# Altium PCB nrf52833_qiaa_var4.PcbDoc
Units mm, origin at the board's own origin, x right, y up, seen from the top; angles counter-clockwise.
Board outline 21.5 x 19.5 mm, 4 copper layers (Top Layer, Mid Layer 1, Mid Layer 2, Bottom Layer), stack 1.583 mm thick; 27 components, 62 nets, 145 pads, 106 vias.
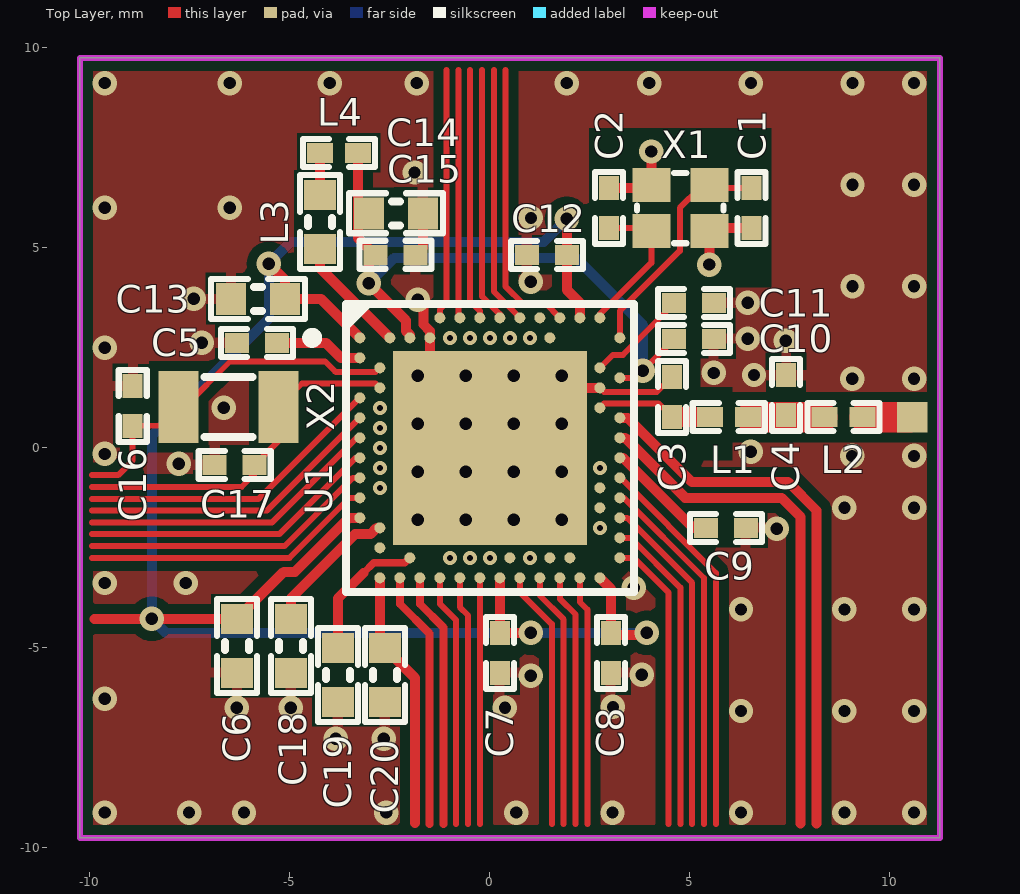
[diagram p0: Top Layer view]
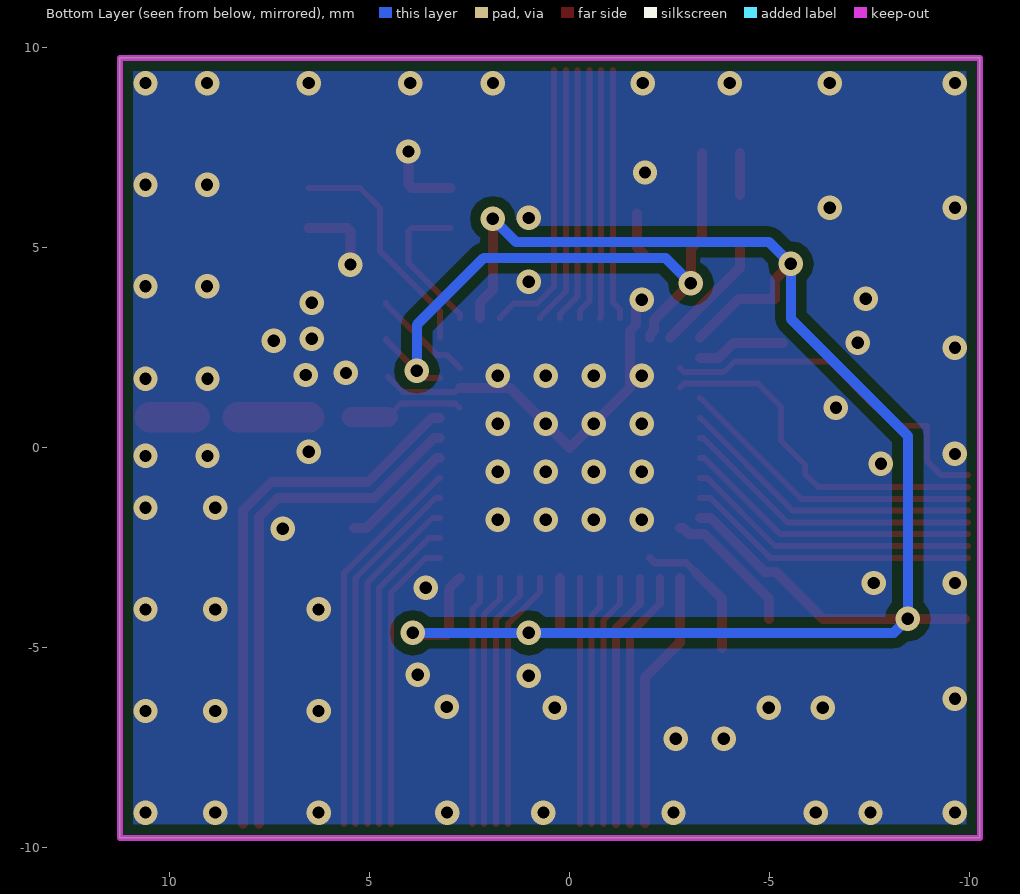
[diagram p1: Bottom Layer view, seen from below]
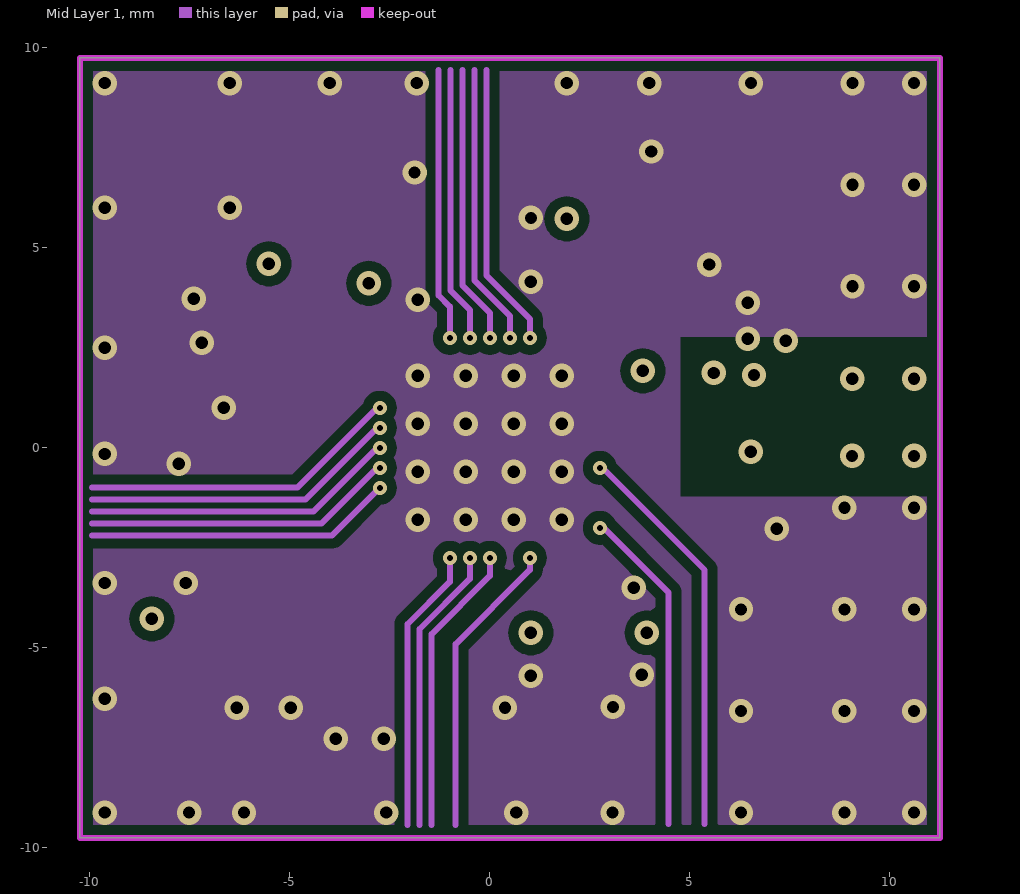
[diagram p2: Mid Layer 1]
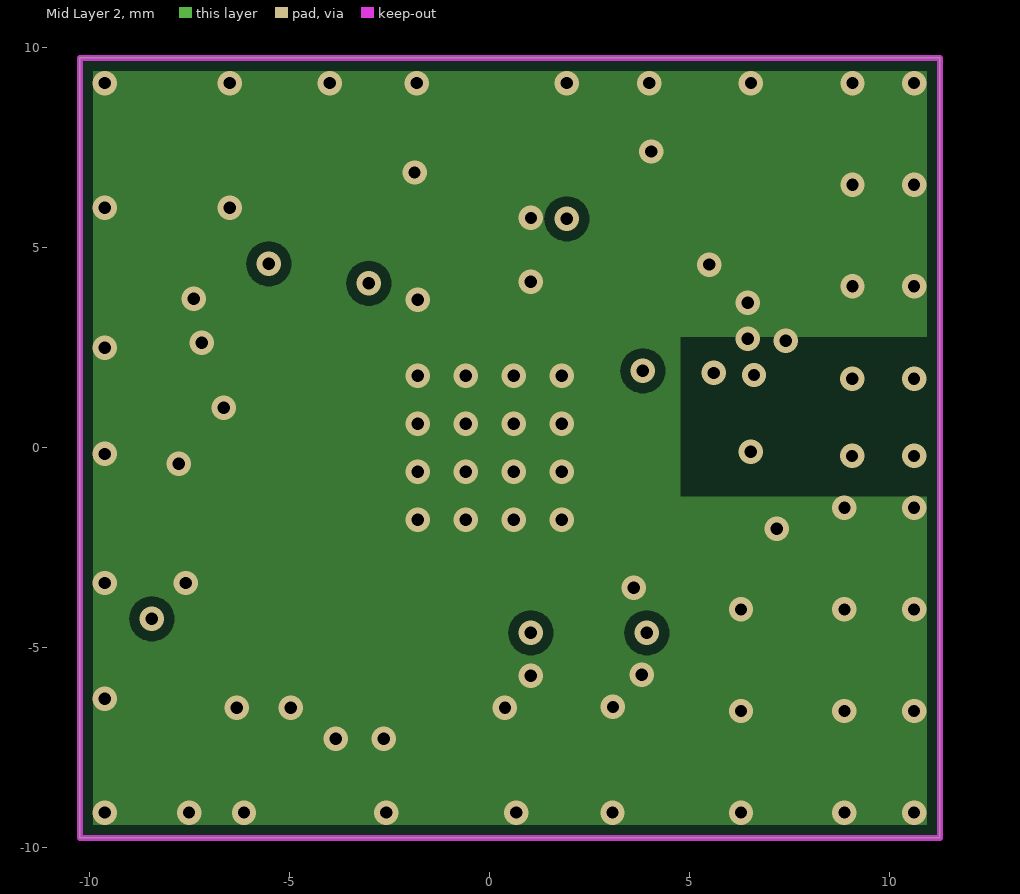
[diagram p3: Mid Layer 2]
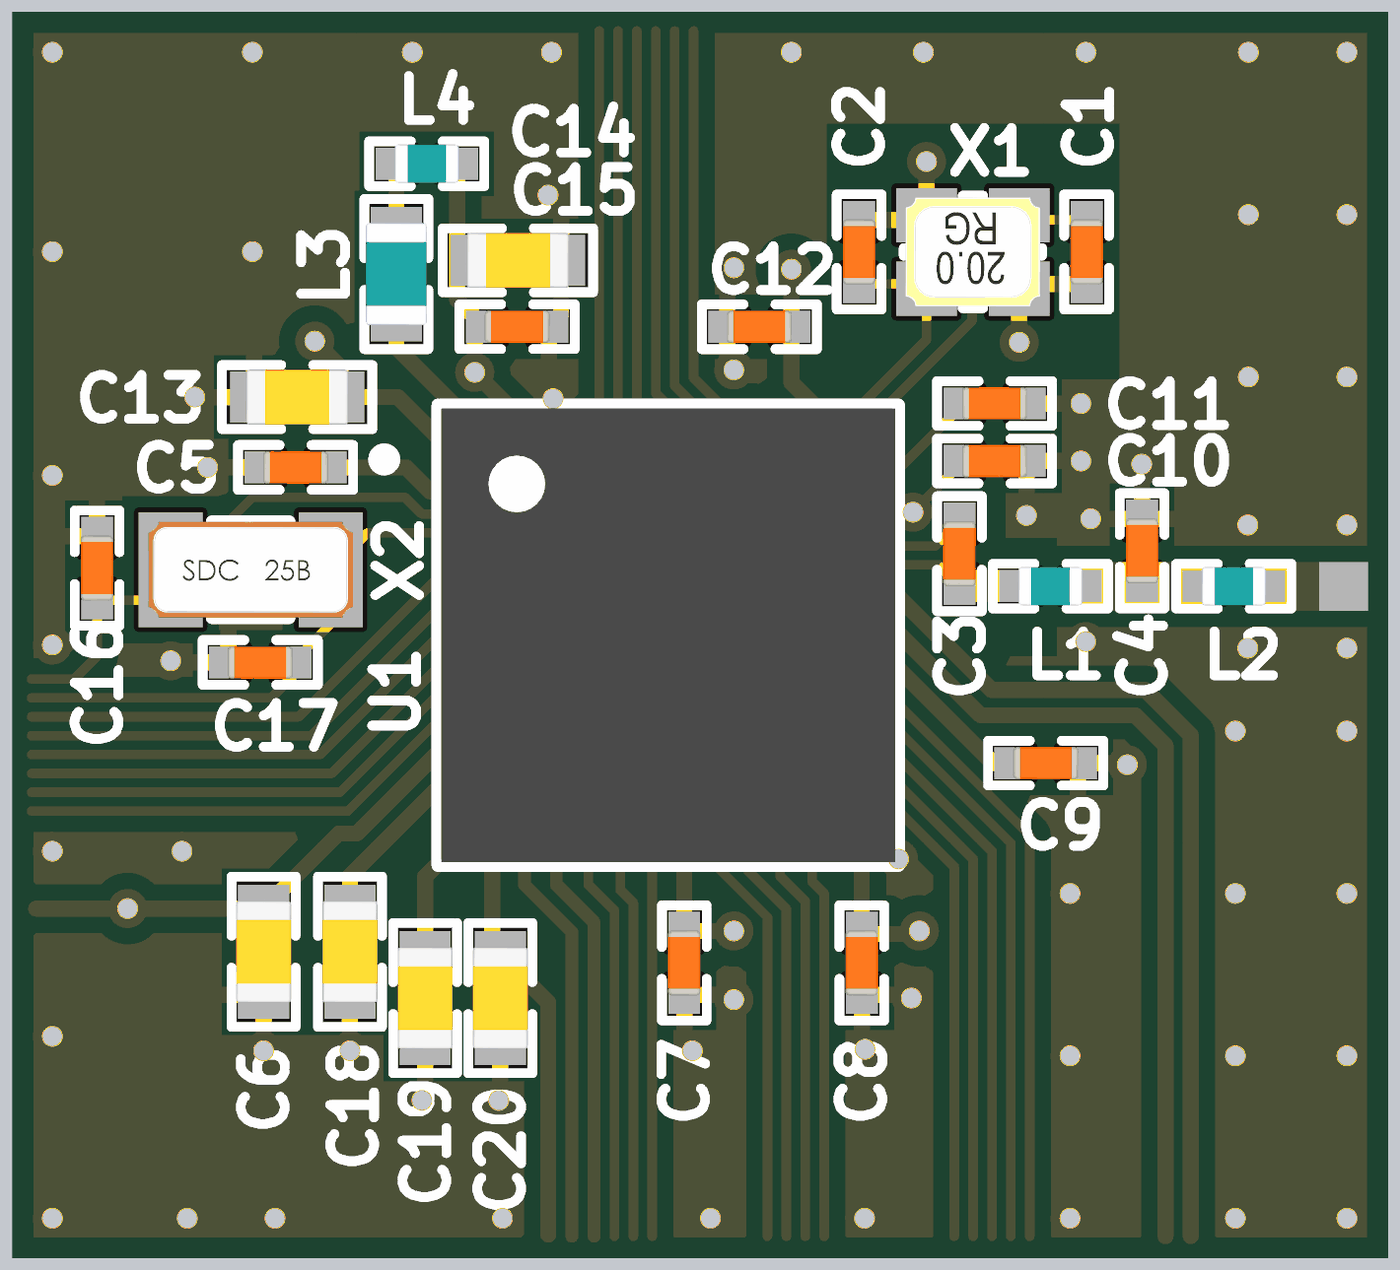
[diagram p4: 3D render of the assembled board from above, using the file's embedded part models]

## Layer stack, top to bottom
Top Solder: solder mask 0.0102, Solder Resist, Dk 3.5
Top Layer: signal copper 0.0356
Dielectric1: core 0.07, FR-4, Dk 4.8
Mid Layer 1: signal copper 0.036
Dielectric 3: prepreg 1.3, Dk 4.2
Mid Layer 2: signal copper 0.036
Dielectric 2: core 0.07, Dk 4.2
Bottom Layer: signal copper 0.0356
Bottom Solder: solder mask 0.0102, Solder Resist, Dk 3.5

## Board outline
-10.25,-9.75 11.25,-9.75 11.25,9.75 -10.25,9.75

## Design rules (kind name [scope] priority, off if disabled: settings)
Clearance Polygon_ANT [(InNamedPolygon('Top_Layer-GND')) or  (InNamedPolygon('Mid_Layer_1-GND')) or (InNamedPolygon('Mid_Layer_2-GND')) or (InNamedPolygon('Bottom_Layer-GND')) vs InNet('RF')] p1: gap=0.254 ignorepadtopadclearanceinfootprint=FALSE
Clearance Polygon [(InNamedPolygon('Top_Layer-GND')) or  (InNamedPolygon('Mid_Layer_1-GND')) or (InNamedPolygon('Mid_Layer_2-GND')) or (InNamedPolygon('Bottom_Layer-GND'))] p2: gap=0.254 ignorepadtopadclearanceinfootprint=FALSE except(0: Arc-Hole Track-Hole SMDPad-Hole THPad-Hole Via-Hole Fill-Hole Poly-Hole Region-Hole Text-Hole)
Clearance Clearance_Top [OnLayer('Top Layer')] p3: gap=0.145 ignorepadtopadclearanceinfootprint=FALSE except(0: Arc-Hole Track-Hole SMDPad-Hole THPad-Hole Via-Hole Fill-Hole Poly-Hole Region-Hole Text-Hole)
Clearance [All] p4: gap=0.15 ignorepadtopadclearanceinfootprint=FALSE
ComponentClearance [All] p1 off: gap=0.254 collisioncheckmode=3 verticalgap=0.254 showdistances=FALSE
FabricationTestPointUsage TestPointUsage [All] p1: valid=0 allowmultiple=FALSE
FabricationTestpoint Testpoint [All] p1: side=3 testpointundercomponent=TRUE minsize=1.016 maxsize=2.54 preferedsize=1.524 minholesize=0 maxholesize=1.016 preferedholesize=0.813 testpointgrid=0.025 allowsidetop=TRUE allowsidebottom=TRUE usegrid=TRUE gridtolerance=0
Height [All] p1 off: minheight=0 maxheight=25.4 prefheight=12.7
HoleSize [All] p1: absolutevalues=TRUE maxlimit=4.064 minlimit=0.1 maxpercent=80.000 minpercent=20.000
MinimumAnnularRing [All] p1 off: minimumring=0.152
PolygonConnect PolygonConnect_1 [isVia and innet(gnd)] p1: connectstyle=Direct reliefconductorwidth=0.254 reliefentries=4 polygonreliefangle="90 Angle" airgapwidth=0.254
PolygonConnect [All] p2: connectstyle=Relief reliefconductorwidth=0.254 reliefentries=4 polygonreliefangle="90 Angle" airgapwidth=0.254
RoutingVias [All] p1: holewidth=0.305 width=0.61 viastyle="Through Hole" minholewidth=0.1 minwidth=0.3 maxholewidth=0.305 maxwidth=0.61
SilkToSolderMaskClearance SilkscreenOverComponentPads [IsPad] p1: minsilkscreentomaskgap=0.254 clearancetoexposedcopper=TRUE
SolderMaskExpansion [All] p1: expansion=0.076 istentingtop=FALSE
Width [All] p1: maxlimit=2 minlimit=0.145 preferedwidth=0.15 minimp=50.000000 maximp=50.000000 favimp=50.000000
24 further rules are at their usual default settings.

## Components (designator, comment, footprint, x,y, rotation, side; value= is the part's Value field where it differs from the comment)
C1 "12pF" CAPC1005X04L 6.539,5.995 r270 top
C2 "12pF" CAPC1005X04L 2.983,5.995 r90 top
C3 "1.0pF" CAPC1005X04L 4.552,1.275 r270 top
C4 "1.2pF" CAPC1005X04L 7.407,1.321 r270 top
C5 "100nF" CAPC1005X04L -5.825,2.625 r180 top
C6 "4.7µF" CAPC1608X06L -6.325,-4.95 r270 top
C7 "100nF" CAPC1005X04L 0.25,-5.125 r270 top
C8 "100nF" CAPC1005X04L 3.025,-5.125 r270 top
C9 "820pF" CAPC1005X04L 5.9,-2 r0 top
C10 "N.C." CAPC1005X04L 5.1,2.725 r180 top
C11 "100pF" CAPC1005X04L 5.1,3.625 r0 top
C12 "100nF" CAPC1005X04L 1.425,4.825 r180 top
C13 "1.0µF" CAPC1608X06L -5.8,3.725 r180 top
C14 "1.0µF" CAPC1608X06L -2.35,5.864 r180 top
C15 "47nF" CAPC1005X04L -2.362,4.826 r0 top
C16 "12pF" CAPC1005X04L -8.927,1.05 r90 top
C17 "12pF" CAPC1005X04L -6.377,-0.425 r180 top
C18 "4.7µF" CAPC1608X06L -4.975,-4.95 r270 top
C19 "4.7µF" CAPC1608X06L -3.8,-5.675 r270 top
C20 "4.7µF" CAPC1608X06L -2.625,-5.675 r270 top
L1 "4.7nH" INDC1005X04L 5.974,0.767 r0 top
L2 "2.2nH" INDC1005X04L 8.839,0.767 r0 top
L3 "10µH" INDC1608X06L -4.25,5.65 r270 top
L4 "15nH" INDC1005X04L -3.775,7.375 r180 top
U1 "nRF52833-QIAA" AQFN50P700X700X85_HS-74N 0,0 r0 top locked
X1 "32MHz" BT-XTAL_2016 4.761,5.995 r180 top
X2 "32.768kHz" XTAL_3215 -6.527,1.025 r0 top

## Footprints (in the part's own frame and the unit in brackets; to place one, negate y for a bottom-side part, rotate by r counter-clockwise, add the part's x,y. Pads: shape width x height; smd on the part's side, far side on the other; paste and mask are expansions set on the pad)
AQFN50P700X700X85_HS-74N [mm] "AQFN, 73-Leads, Body 7.00x7.00mm, Pitch 0.50mm, Thermal Pad 4.95x4.95mm, IPC Medium Density"
  rect 4.85x4.85 smd mask+0.05: 74(0,0)
  round 0.275 smd paste+0.012 mask+0.05: A8(-1.25,3.25) A10(-0.75,3.25) A12(-0.25,3.25) A14(0.25,3.25) A16(0.75,3.25) A18(1.25,3.25) A20(1.75,3.25) A22(2.25,3.25) A23(2.75,3.25) AA24(3.25,-2.25) AB2(-2.75,-2.5) AC5(-2,-2.75) AC9(-1,-2.75) AC11(-0.5,-2.75) AC13(0,-2.75) AC15(0.5,-2.75) AC17(1,-2.75) AC19(1.5,-2.75) AC21(2,-2.75) AC24(3.25,-2.75) AD2(-2.75,-3.25) AD4(-2.25,-3.25) AD6(-1.75,-3.25) AD8(-1.25,-3.25) AD10(-0.75,-3.25) AD12(-0.25,-3.25) AD14(0.25,-3.25) AD16(0.75,-3.25) AD18(1.25,-3.25) AD20(1.75,-3.25) AD22(2.25,-3.25) AD23(2.75,-3.25) B1(-3.25,2.75) B3(-2.5,2.75) B5(-2,2.75) B7(-1.5,2.75) B9(-1,2.75) B11(-0.5,2.75) B13(0,2.75) B15(0.5,2.75) B17(1,2.75) B19(1.5,2.75) B24(3.25,2.75) C1(-3.25,2.25) D2(-2.75,2) D23(2.75,2) E24(3.25,1.75) F2(-2.75,1.5) F23(2.75,1.5) G1(-3.25,1.25) H2(-2.75,1) H23(2.75,1) J1(-3.25,0.75) J24(3.25,0.75) K2(-2.75,0.5) L1(-3.25,0.25) L24(3.25,0.25) M2(-2.75,0) N1(-3.25,-0.25) N24(3.25,-0.25) P2(-2.75,-0.5) P23(2.75,-0.5) R1(-3.25,-0.75) R24(3.25,-0.75) T2(-2.75,-1) T23(2.75,-1) U1(-3.25,-1.25) U24(3.25,-1.25) V23(2.75,-1.5) W1(-3.25,-1.75) W24(3.25,-1.75) Y2(-2.75,-2) Y23(2.75,-2)
  silkscreen extent -4.56,-3.6 3.6,3.6, body extent -3.55,-3.55 3.55,3.55, height 0.85
BT-XTAL_2016 [mm] "Crystal 2.0 x 1.6 mm"
  rect 0.95x0.85 smd: 1(-0.725,-0.575) 2(0.725,-0.575) 3(0.725,0.575) 4(-0.725,0.575)
  silkscreen extent -1.08,-0.88 1.08,0.88, body extent -1.05,-0.85 1.05,0.85, height 0.56
CAPC1005X04L [mm] "Chip Capacitor, 2-Leads, Body 1.0x0.5mm, IPC High Density"
  rect 0.6x0.5 smd: 1(-0.5,0) 2(0.5,0)
  silkscreen extent -0.9,-0.35 0.9,0.35, body extent -0.51,-0.25 0.51,0.25, height 0.5
CAPC1608X06L [mm] "Chip Capacitor, 2-Leads, Body 1.6x0.8mm, IPC High Density"
  rect 0.75x0.8 smd: 1(-0.675,0) 2(0.675,0)
  silkscreen extent -1.17,-0.5 1.17,0.5, body extent -0.8,-0.43 0.8,0.43, height 0.8
INDC1005X04L [mm] "Chip Inductor, 2-Leads, Body 1.0x0.5mm, IPC High Density"
  rect 0.65x0.5 smd: 1(-0.475,0) 2(0.475,0)
  silkscreen extent -0.9,-0.35 0.9,0.35, body extent -0.5,-0.3 0.5,0.3, height 0.5
INDC1608X06L [mm] "Chip Inductor, 2-Leads, Body 1.6x0.8mm, IPC High Density"
  rect 0.75x0.8 smd: 1(-0.675,0) 2(0.675,0)
  silkscreen extent -1.17,-0.5 1.17,0.5, body extent -0.8,-0.48 0.8,0.48, height 0.8
XTAL_3215 [mm] "XTAL SMD 3.2 x 1.5 mm"
  rect 1x1.8 smd: 1(-1.25,0) 2(1.25,0)
  silkscreen extent -0.6,-0.75 0.6,0.75, body extent -1.6,-0.75 1.6,0.75, height 0.81

## Part data
C1 C2 C16 C17: library part C0402-12p, "Capacitor, NP0, ±2%", Footprint Doc=0402, LatestRevisionDate=2011-05-11, Note=50V, Part Number=C0402-12p, Pin Count=2, Published=2009-05-08, Publisher="Nordic Semiconductor"
C3: library part C0402-1.0p, "Capacitor, NP0, ±5%", Footprint Doc=0402, LatestRevisionDate=2017-02-23, Note=50V, Part Number=C0402-1.0p, Pin Count=2, Published=2009-05-08, Publisher="Nordic Semiconductor"
C4: library part C0402-1.2p, "Capacitor, NP0, ±5%", Footprint Doc=0402, LatestRevisionDate=2011-05-11, Note=50V, Part Number=C0402-1.2p, Pin Count=2, Published=2009-05-08, Publisher="Nordic Semiconductor"
C5 C7 C8 C12: library part C0402-100n, "Capacitor, X7R, ±10%", Footprint Doc=0402, LatestRevisionDate=2009-11-23, Note=16V, Part Number=C0402-100n, Pin Count=2, Published=2009-05-08, Publisher="Nordic Semiconductor"
C6 C19: library part C0603-4µ7-6.3V-X7R, "Capacitor, X7R, ±10%", Footprint Doc=0603, LatestRevisionDate=2015-06-10, Note=6.3V, Part Number=C0603-4µ7-6.3V-X7R, Pin Count=2, Published=2015-06-10, Publisher="Nordic Semiconductor"
C9: library part C0402-820p, "Capacitor, NP0, ±5%", Assembly="Not required for Bxx and later", Footprint Doc=0402, LatestRevisionDate=2009-05-08, Note=50V, Part Number=C0402-820p, Pin Count=2, Published=2009-05-08, Publisher="Nordic Semiconductor"
C10: library part C0402-N.C., "Not mounted", Assembly="Not mounted", Footprint Doc=0402, LatestRevisionDate=2009-05-08, Part Number=C0402-N.C., Pin Count=2, Published=2009-05-08, Publisher="Nordic Semiconductor"
C11: library part C0402-100p, "Capacitor, NP0, ±5%", Footprint Doc=0402, LatestRevisionDate=2009-05-08, Note=50V, Part Number=C0402-100p, Pin Count=2, Published=2009-05-08, Publisher="Nordic Semiconductor"
C13 C14: library part C0603-1µ0, "Capacitor, X7R, ±10%", Footprint Doc=0603, LatestRevisionDate=2013-06-05, Note=16V, Part Number=C0603-1µ0, Pin Count=2, Published=2009-05-08, Publisher="Nordic Semiconductor"
C15: library part C0402-47n, "Capacitor, X7R, ±10%", Footprint Doc=0402, LatestRevisionDate=2009-05-08, Part Number=C0402-47n, Pin Count=2, Published=2009-05-08, Publisher="Nordic Semiconductor"
C18 C20: library part C0603-4µ7-10V-X7S, "Capacitor, X7S, ±10%", Footprint Doc=0603, LatestRevisionDate=2016-08-15, Note=10V, Part Number=C0603-4µ7-10V-X7S, Pin Count=2, Published=2016-08-15, Publisher="Nordic Semiconductor"
L1: library part L0402-4n7, "High frequency chip inductor ±5%", Footprint Doc=0402, LatestRevisionDate=2012-09-19, Note="High frequency chip inductor ±5%", Part Number=L0402-4n7, Pin Count=2, Published=2009-05-08, Publisher="Nordic Semiconductor"
L2: library part L0402-2n2, "High frequency chip inductor ±5%", Footprint Doc=0402, LatestRevisionDate=2012-09-19, Note="High frequency chip inductor ±5%", Part Number=L0402-2n2, Pin Count=2, Published=2009-05-08, Publisher="Nordic Semiconductor"
L3: library part L0603-10µ-TDK, "Chip inductor, IDC,min = 50 mA, ±20%", Footprint Doc=0603, LatestRevisionDate=2012-09-19, Part Number=L0603-10µ-TDK, Pin Count=2, Published=2019-05-06, Publisher="Nordic Semiconductor"
L4: library part L0402-15n, "High frequency chip inductor ±10%", Footprint Doc=0402, LatestRevisionDate=2012-09-19, Part Number=L0402-15n, Pin Count=2, Published=2010-07-12, Publisher="Nordic Semiconductor"
U1: "Multi-protocol Bluetooth Low Energy, IEEE 802.15.4, ANT and 2.4GHz proprietary system-on-chip", Manufacturer="Nordic Semiconductor", Footprint Doc=AQFN-73, LatestRevisionDate=2018-12-03, Manufacturer Part Number=nRF52833-QIAA, Part Number=nRF52833-QIAA, Pin Count=73, Published=2018-12-03, Publisher="Nordic Semiconductor"
X1: library part XTAL_SMD2016_32MHz_8pF_General, "XTAL SMD 2016, 32MHz, Cl=8pF, Total Tol: ±40ppm", Footprint Doc=XTAL_2016, LatestRevisionDate=2016-08-19, Part Number=XTAL_SMD2016_32MHz_8pF_General, Pin Count=4, Published=2016-08-19, Publisher="Nordic Semiconductor"
X2: library part XTAL_SMD3215_32.768kHz_9pF_General, "XTAL SMD 3215, 32.768kHz, Cl=9pF, Total Tol: ±50ppm", Footprint Doc=XTAL_3215, LatestRevisionDate=2016-08-19, Part Number=XTAL_SMD3215_32.768kHz_9pF_General, Pin Count=2, Published=2016-08-19, Publisher="Nordic Semiconductor"

## Free pads (board coordinates)
  rect 0.762x0.762 smd mask+0.076: 0(10.557,0.762)
  round 0.3 on Mech16: 1(-2.75,-1) 1(-2.75,-0.5) 1(-2.75,0) 1(-2.75,0.5) 1(-2.75,1) 1(-1,-2.75) 1(-1,2.75) 1(-0.5,-2.75) 1(-0.5,2.75) 1(0,-2.75) 1(0,2.75) 1(0.5,2.75) 1(1,-2.75) 1(1,2.75) 1(2.75,-2) 1(2.75,-0.5)

## Via types
v1: diameter 0.61, hole 0.305, Top Layer to Bottom Layer, tented both sides, 90 vias
v2: diameter 0.35, hole 0.15, Top Layer to Mid Layer 1, tented top, 16 vias

## Nets (pads, with @x,y where several pads share a name; then routed paths per layer and width w, separated by ;. In a path a pad name is that pad's centre, name@x,y a point inside that pad or via, vN(x,y) a via of type N, cw(c..) or ccw(c..) an arc to the next point about the centre after c; other vN are vias at no path point)
D+: U1.AD6 | length 6.4
  Top Layer w0.2: U1.AD6 -1.75,-3.9 -1.16,-4.49 -1.16,-9.4
D-: U1.AD4 | length 6.5
  Top Layer w0.2: U1.AD4 -2.25,-3.9 -1.505,-4.645 -1.505,-9.4
DEC1: C5.1 U1.C1 | length 2.2
  Top Layer w0.25: C5.1 -4.1,2.625 -3.725,2.25 U1.C1
DEC3: C11.1 U1.D23 | length 2.5
  Top Layer w0.15: U1.D23 2.756,2 3.081,2.325 3.331,2.325 4.6,3.594 C11.1
DEC4_6: C10.2 C14.2 C15.1 L4.1 U1.B5 U1.E24 | length 15.9
  Top Layer w0.15: U1.E24 3.65,1.75 v1(3.825,1.925) 4.6,2.7 C10.2
  Top Layer w0.25: L4.1 -3.3,5.25 -3.025,4.975 v1(-3.025,4.112) -2.1,3.187 -2.1,2.926 -2,2.826 U1.B5
  Bottom Layer w0.25: v1(-3.025,4.112) -2.387,4.75 2.15,4.75 3.825,3.075 v1(3.825,1.925)
GND: C1.2 C2.2 C3.1 C4.1 C5.2 C6.2 C7.2 C8.2 C9.2 C10.1 C11.2 C12.2 C13.2 C14.1 C15.2 C16.2 C17.2 C18.2 C19.2 C20.2 U1.74 U1.B7 U1.F23 X1.2 X1.4 | length 14.6
  Top Layer w0.145: U1.F23 2.855,1.395 4.171,1.395 C3.1
  Top Layer w0.25: C15.2 -1.675,5.013 C14.1 ; v1@-1.658,3.642 -1.658,3.081 -1.5,2.924 U1.B7 -1.5,1.5 U1.74 v1(0.6,0.6) 1.5,1.5 U1.F23 ; C2.2 3.961,6.495 X1.2 ; X1.2@4.005,6.601 X1.2 ; v1(4.036,7.409) X1.2 ; v1(5.486,4.581) X1.4 ; X1.4@5.561,5.495 C1.2
  other v1: -9.627,-9.119 -7.518,-9.119 -6.147,-9.119 -2.591,-9.119 0.66,-9.119 3.068,-9.119 6.279,-9.119 8.865,-9.119 10.608,-9.119 -3.85,-7.275 -2.65,-7.275 6.279,-6.579 8.865,-6.579 10.608,-6.579 -6.325,-6.5 -4.975,-6.5 0.377,-6.5 3.076,-6.476 -9.627,-6.274 1.025,-5.7 3.8,-5.675 6.279,-4.039 8.865,-4.039 10.608,-4.039 3.6,-3.5 -9.627,-3.378 -7.6,-3.378 7.175,-2.025 -1.8,-1.8 -0.6,-1.8 0.6,-1.8 1.8,-1.8 8.865,-1.499 10.608,-1.499 -1.8,-0.6 -0.6,-0.6 0.6,-0.6 1.8,-0.6 -7.777,-0.4 9.058,-0.202 10.608,-0.202 -9.627,-0.152 6.525,-0.1 -1.8,0.6 -0.6,0.6 1.8,0.6 -6.652,1 9.059,1.725 10.608,1.725 -1.8,1.8 -0.6,1.8 0.6,1.8 1.8,1.8 6.604,1.821 5.599,1.874 -9.627,2.5 -7.2,2.625 7.4,2.676 6.45,2.725 6.45,3.625 -1.8,3.7 -7.4,3.725 9.068,4.039 10.608,4.039 1.025,4.15 1.027,5.748 -9.627,6 -6.5,6 9.068,6.579 10.608,6.579 -1.88,6.883 -9.627,9.119 -6.5,9.119 -4,9.119 -1.825,9.119 1.924,9.119 3.988,9.119 6.528,9.119 9.068,9.119 10.608,9.119
NetC3_2: C3.2 L1.1 U1.H23 | length 2.9
  Top Layer w0.145: U1.H23 2.855,1.105 4.22,1.105 4.555,0.771 C3.2@4.56,0.766
  Top Layer w0.508: C3.2@4.555,0.771 L1.1@5.449,0.771
NetC4_2: C4.2 L1.2 L2.1 | length 1.8
  Top Layer w0.762: L1.2@6.518,0.762 L2.1@8.306,0.762
NetC9_1: C9.1 U1.N24 | length 2.9
  Top Layer w0.25: U1.N24 3.326,-0.25 5.076,-2 C9.1
NetC19_1: C19.1 U1.AC5 | length 3.5
  Top Layer w0.184: -3.158,-3.128 -2.905,-2.875 -2.125,-2.875 U1.AC5
  Top Layer w0.25: C19.1 -3.8,-3.77 -3.158,-3.128
NetL3_1: L3.1 L4.2 | length 1.1
  Top Layer w0.25: L3.1 L4.2
NetL3_2: L3.2 U1.B3 | length 2.9
  Top Layer w0.25: L3.2 -4.25,4.5 U1.B3
P0.00/XL1: C16.1 U1.D2 X2.1 | length 9
  Top Layer w0.145: C16.1 -8.252,0.55 X2.1 -7.625,1.025 -6.492,2.157 -4.117,2.157 -3.867,1.907 -3.857,1.907 -3.845,1.895 -2.855,1.895 U1.D2
  Top Layer w0.15: -9.95,-0.685 -9.29,-0.685 -8.927,-0.322 C16.1
P0.01/XL2: C17.1 U1.F2 X2.2 | length 8.9
  Top Layer w0.145: C17.1 -5.277,0.175 X2.2 -4.697,1.605 -2.855,1.605 U1.F2
  Top Layer w0.15: -9.95,-0.98 -6.207,-0.98 -5.877,-0.65 C17.1
P0.02/AIN0: U1.A12 | length 6.3
  Top Layer w0.15: -0.49,9.45 -0.49,3.665 -0.25,3.425 U1.A12
P0.03/AIN1: U1.B13 | length 7
  Mid Layer 1 w0.15: -0.68,9.449 -0.68,4.055 0,3.375 v2(0,2.75)
P0.04/AIN2: U1.J1 | length 7.7
  Top Layer w0.15: -9.95,-1.57 -5.576,-1.57 -3.256,0.75 U1.J1
P0.05/AIN3: U1.K2 | length 7.9
  Mid Layer 1 w0.15: -9.947,-1.291 -4.606,-1.291 -2.816,0.5 v2(-2.75,0.5)
P0.06: U1.L1 | length 7.6
  Top Layer w0.15: -9.95,-1.865 -5.44,-1.865 -3.325,0.25 U1.L1
P0.07: U1.M2 | length 7.9
  Mid Layer 1 w0.15: -9.947,-1.591 -4.406,-1.591 -2.816,0 v2(-2.75,0)
P0.08: U1.N1 | length 7.5
  Top Layer w0.15: -9.95,-2.16 -5.26,-2.16 -3.35,-0.25 U1.N1
P0.09/NFC1: U1.L24 | length 13
  Top Layer w0.25: U1.L24 3.385,0.25 4.885,-1.25 7.295,-1.25 7.772,-1.727 7.772,-9.398
P0.10/NFC2: U1.J24 | length 13.7
  Top Layer w0.25: U1.J24 3.444,0.75 5.049,-0.855 7.459,-0.855 8.167,-1.564 8.167,-9.398
P0.11: U1.T2 | length 7.7
  Mid Layer 1 w0.15: -9.947,-2.191 -3.941,-2.191 v2(-2.75,-1) v2@-2.773,-1
P0.12: U1.U1 | length 7.3
  Top Layer w0.15: -9.95,-2.75 -5.008,-2.75 -3.508,-1.25 U1.U1
P0.13: U1.AD8 | length 6.3
  Top Layer w0.15: U1.AD8 -1.25,-3.9 -0.84,-4.31 -0.84,-9.4
P0.14: U1.AC9 | length 7.1
  Mid Layer 1 w0.15: -2.057,-9.423 -2.057,-4.409 -1,-3.352 v2(-1,-2.75)
P0.15: U1.AD10 | length 6.2
  Top Layer w0.15: U1.AD10 -0.75,-3.983 -0.545,-4.188 -0.545,-9.4
P0.16: U1.AC11 | length 7.2
  Mid Layer 1 w0.15: -1.757,-9.423 -1.757,-4.533 -0.5,-3.276 v2(-0.5,-2.75)
P0.17: U1.AD12 | length 6.1
  Top Layer w0.15: -0.25,-9.4 U1.AD12
P0.18/RESET: U1.AC13 | length 7.3
  Mid Layer 1 w0.152: -1.456,-9.423 -1.456,-4.658 0,-3.202 v2(0,-2.75)
P0.19: U1.A14 | length 6.4
  Top Layer w0.15: -0.195,9.45 -0.195,3.787 0.25,3.342 U1.A14
P0.20: U1.AD16 | length 6.5
  Top Layer w0.15: U1.AD16 0.75,-3.608 1.55,-4.408 1.55,-9.4
P0.21: U1.AC17 | length 7.4
  Mid Layer 1 w0.15: -0.855,-9.423 -0.855,-4.907 1,-3.052 v2(1,-2.75)
P0.22: U1.AD18 | length 6.4
  Top Layer w0.15: U1.AD18 1.25,-3.691 1.846,-4.287 1.846,-9.4
P0.23: U1.B17 | length 7.1
  Mid Layer 1 w0.15: -0.08,9.449 -0.08,4.304 1,3.224 v2(1,2.75)
P0.24: U1.AD20 | length 6.3
  Top Layer w0.15: U1.AD20 1.75,-3.773 2.141,-4.165 ; 2.142,-9.4 2.142,-4.165
P0.25: U1.A20 | length 7.1
  Top Layer w0.15: 0.395,9.45 0.395,4.032 0.819,3.608 1.398,3.608 1.75,3.256 U1.A20
P0.26: U1.G1 | length 7.7
  Top Layer w0.15: -9.95,-1.275 -5.781,-1.275 -3.256,1.25 U1.G1
P0.27: U1.H2 | length 8
  Mid Layer 1 w0.15: -9.947,-0.991 -4.806,-0.991 -2.816,1 v2(-2.75,1)
P0.28/AIN4: U1.B11 | length 6.9
  Mid Layer 1 w0.15: -0.98,9.449 -0.98,3.931 -0.5,3.451 v2(-0.5,2.75)
P0.29/AIN5: U1.A10 | length 6.2
  Top Layer w0.15: -0.785,9.45 -0.785,3.285 U1.A10
P0.30/AIN6: U1.B9 | length 6.8
  Mid Layer 1 w0.15: -1.28,9.449 -1.28,3.807 -1,3.527 v2(-1,2.75)
P0.31/AIN7: U1.A8 | length 6.3
  Top Layer w0.15: U1.A8 -1.25,3.46 -1.08,3.63 -1.08,9.45
P1.00: U1.AD22 | length 6.2
  Top Layer w0.15: U1.AD22 2.25,-3.855 2.437,-4.042 2.437,-9.4
P1.01: U1.Y23 | length 8.2
  Mid Layer 1 w0.15: v2(2.75,-2) 2.849,-2 4.47,-3.621 4.47,-9.4
P1.02: U1.W24 | length 8.5
  Top Layer w0.15: U1.W24 3.434,-1.75 5.06,-3.376 5.06,-9.4
P1.03: U1.B15 | length 7.1
  Mid Layer 1 w0.15: -0.38,9.449 -0.38,4.179 0.5,3.3 v2(0.5,2.75)
P1.04: U1.U24 | length 9.1
  Top Layer w0.15: U1.U24 3.352,-1.25 5.355,-3.254 5.355,-9.4
P1.05: U1.A16 | length 6.5
  Top Layer w0.15: 0.1,9.45 0.1,3.909 0.75,3.259 U1.A16
P1.06: U1.R24 | length 9.7
  Top Layer w0.15: U1.R24 3.269,-0.75 5.65,-3.132 5.65,-9.4
P1.07: U1.P23 | length 10
  Mid Layer 1 w0.15: v2(2.75,-0.5) 2.816,-0.5 5.37,-3.055 5.37,-9.4
P1.08: U1.P2 | length 7.8
  Mid Layer 1 w0.15: -9.947,-1.891 -4.206,-1.891 -2.816,-0.5 v2(-2.75,-0.5)
P1.09: U1.R1 | length 7.4
  Top Layer w0.15: -9.95,-2.455 -5.13,-2.455 -3.425,-0.75 U1.R1
RF: L2.2 pad.0 | length 1.1
  Top Layer w0.762: L2.2@9.373,0.762 pad.0@10.5,0.762
SWDCLK: U1.AA24 | length 7.9
  Top Layer w0.15: U1.AA24 3.517,-2.25 4.765,-3.498 4.765,-9.4
SWDIO: U1.AC24 | length 7.4
  Top Layer w0.15: U1.AC24 3.6,-2.75 4.47,-3.62 4.47,-9.4
VBUS: C20.1 U1.AD2 | length 6.5
  Top Layer w0.25: U1.AD2 -2.75,-4.875 C20.1 -1.875,-5.75 -1.875,-9.375
VDD_NRF: C6.1 C7.1 C8.1 C12.1 C13.1 U1.A22 U1.AD14 U1.AD23 U1.B1 U1.W1 | length 49.4
  Top Layer w0.25: -9.881,-4.275 v1(-8.45,-4.275) C6.1 -5.15,-3.1 -4.87,-3.1 -3.52,-1.75 U1.W1 ; v1(-5.525,4.6) -5.125,4.2 C13.1 -4.225,3.725 U1.B1 ; U1.AD14 C7.1 v1(1.025,-4.625) ; C12.1 1.925,3.95 2.25,3.625 U1.A22 ; C12.1@1.925,4.975 v1(1.925,5.725) 1.925,4.85 C12.1@1.937,4.838 ; U1.AD23 3.025,-3.525 C8.1 3.075,-4.675 v1@3.925,-4.675
  Bottom Layer w0.25: v1(1.025,-4.625) -8.1,-4.625 v1(-8.45,-4.275) -8.45,0.3 -5.525,3.225 v1(-5.525,4.6) -4.975,5.15 1.35,5.15 v1(1.925,5.725) ; v1(1.025,-4.625) v1(3.925,-4.625)
VDDH: C18.1 U1.Y2 | length 3.5
  Top Layer w0.25: C18.1 -4.975,-3.764 -3.37,-2.158 -2.985,-2.158 -2.826,-2 U1.Y2
XC1: C1.1 U1.B24 X1.1 | length 5.9
  Top Layer w0.15: U1.B24 3.25,3.423 4.75,4.923 4.75,6 5.245,6.495 C1.1
XC2: C2.1 U1.A23 X1.3 | length 3.8
  Top Layer w0.15: U1.A23 2.75,3.34 4.036,4.626 X1.3 3.961,5.495 C2.1
pads on no net: U1.A18 U1.AB2 U1.AC15 U1.AC19 U1.AC21 U1.B19 U1.T23 U1.V23

## Polygon pours and split planes (outlines as drawn)
GND on Bottom Layer "Bottom_Layer-GND" (solid, remove dead copper, pour order 1001): -11.075,10.45 -11.075,-10.15 13,-10.15 13,10.45
GND on Mid Layer 2 "Mid_Layer_2-GND" (solid, remove dead copper, pour order 1002): -11.275,10.239 -11.275,-10.275 13,-10.275 13,10.239
GND on Mid Layer 1 "Mid_Layer_1-GND" (solid, remove dead copper, pour order 1004): -11.547,10.058 -11.547,-10.456 13.153,-10.456 13.153,10.058
GND on Top Layer "Top_Layer-GND" (solid, remove dead copper, pour order 1000): -10.975,10.414 -10.975,-10.1 13,-10.1 13,10.414

## Keep-outs
Keep-Out Layer:
  the board outline again, w0.152

## Other copper
Top Layer:
  pour cut-out: 2.479,4 7.054,4 7.054,8.003 2.479,8.003
  pour cut-out: 5.842,1.398 5.842,0.126 9.755,0.126 9.755,1.398
  pour cut-out: 3.332,-0.325 6.075,-0.325 6.075,1.525 5.275,1.525 5.275,2.571 3.332,2.571
  pour cut-out: -6.5,-5.4 -6.5,-4 -4.33,-4 -4.33,-5.4
  pour cut-out: -4.5,-6.25 -4.5,-4.75 -2,-4.75 -2,-6.25
  pour cut-out: 0.25,-0.75 0.25,0.75 2.75,0.75 2.75,-0.75
  pour cut-out: 2.573,-3.987 1.513,-2.927 3.28,-1.159 4.341,-2.22
Mid Layer 1:
  pour cut-out: 12.25,-1.225 4.755,-1.225 4.755,2.775 12.25,2.775
Mid Layer 2:
  pour cut-out: 12.25,-1.225 4.755,-1.225 4.755,2.775 12.25,2.775

## Silkscreen, mask and mechanical layers (free items; w line width, h text height)
Mechanical 1:
  the board outline again, w0.152

## Dimensions
11.25,-9.75 to 11.25,9.75 on Mechanical 3
11.25,-9.75 to -10.25,-9.75 on Mechanical 3